# Altium PCB PCB2_2.pcbdoc
Units mil, origin at the board's own origin, x right, y up, seen from the top; angles counter-clockwise.
Board outline 1254.78 x 1706.7 mil, 4 copper layers (Top Layer, Inner1, Inner2, Bottom Layer); 47 components, 40 nets, 209 pads, 46 vias.
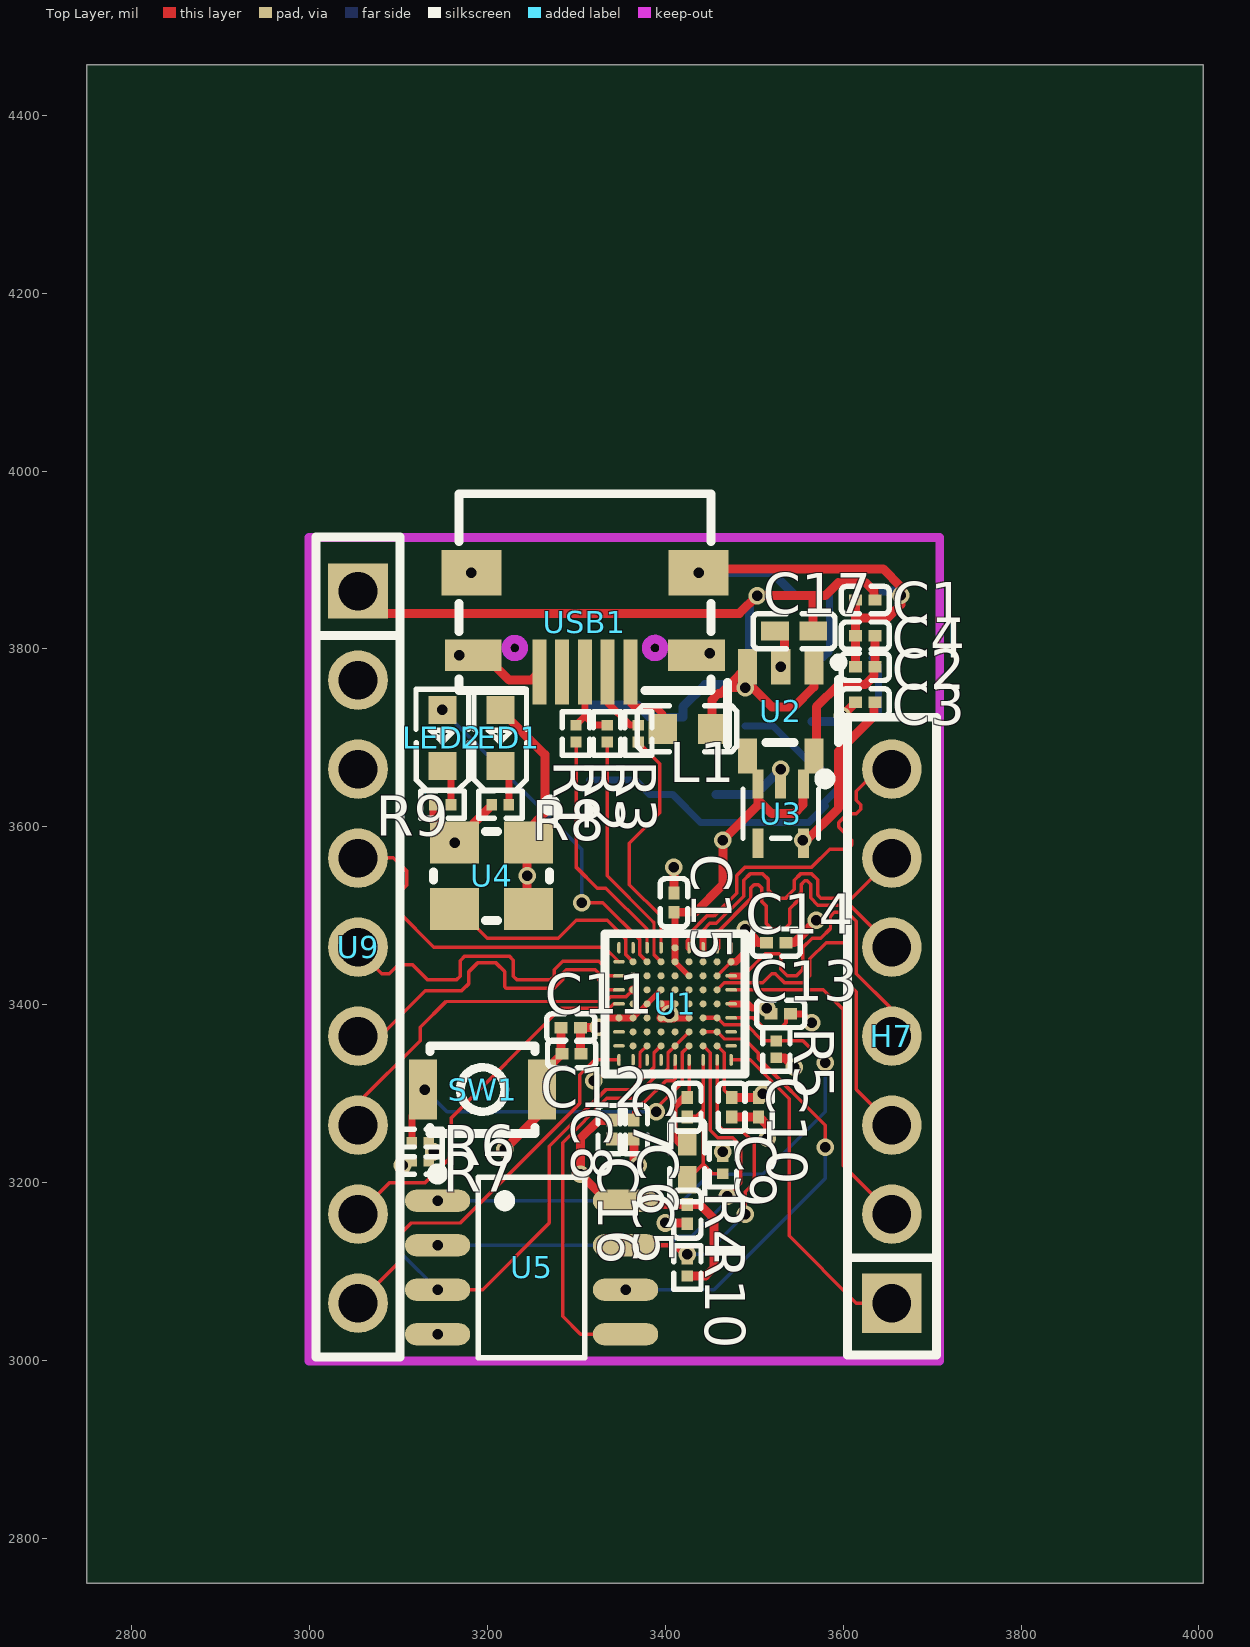
[diagram p0: Top Layer view]
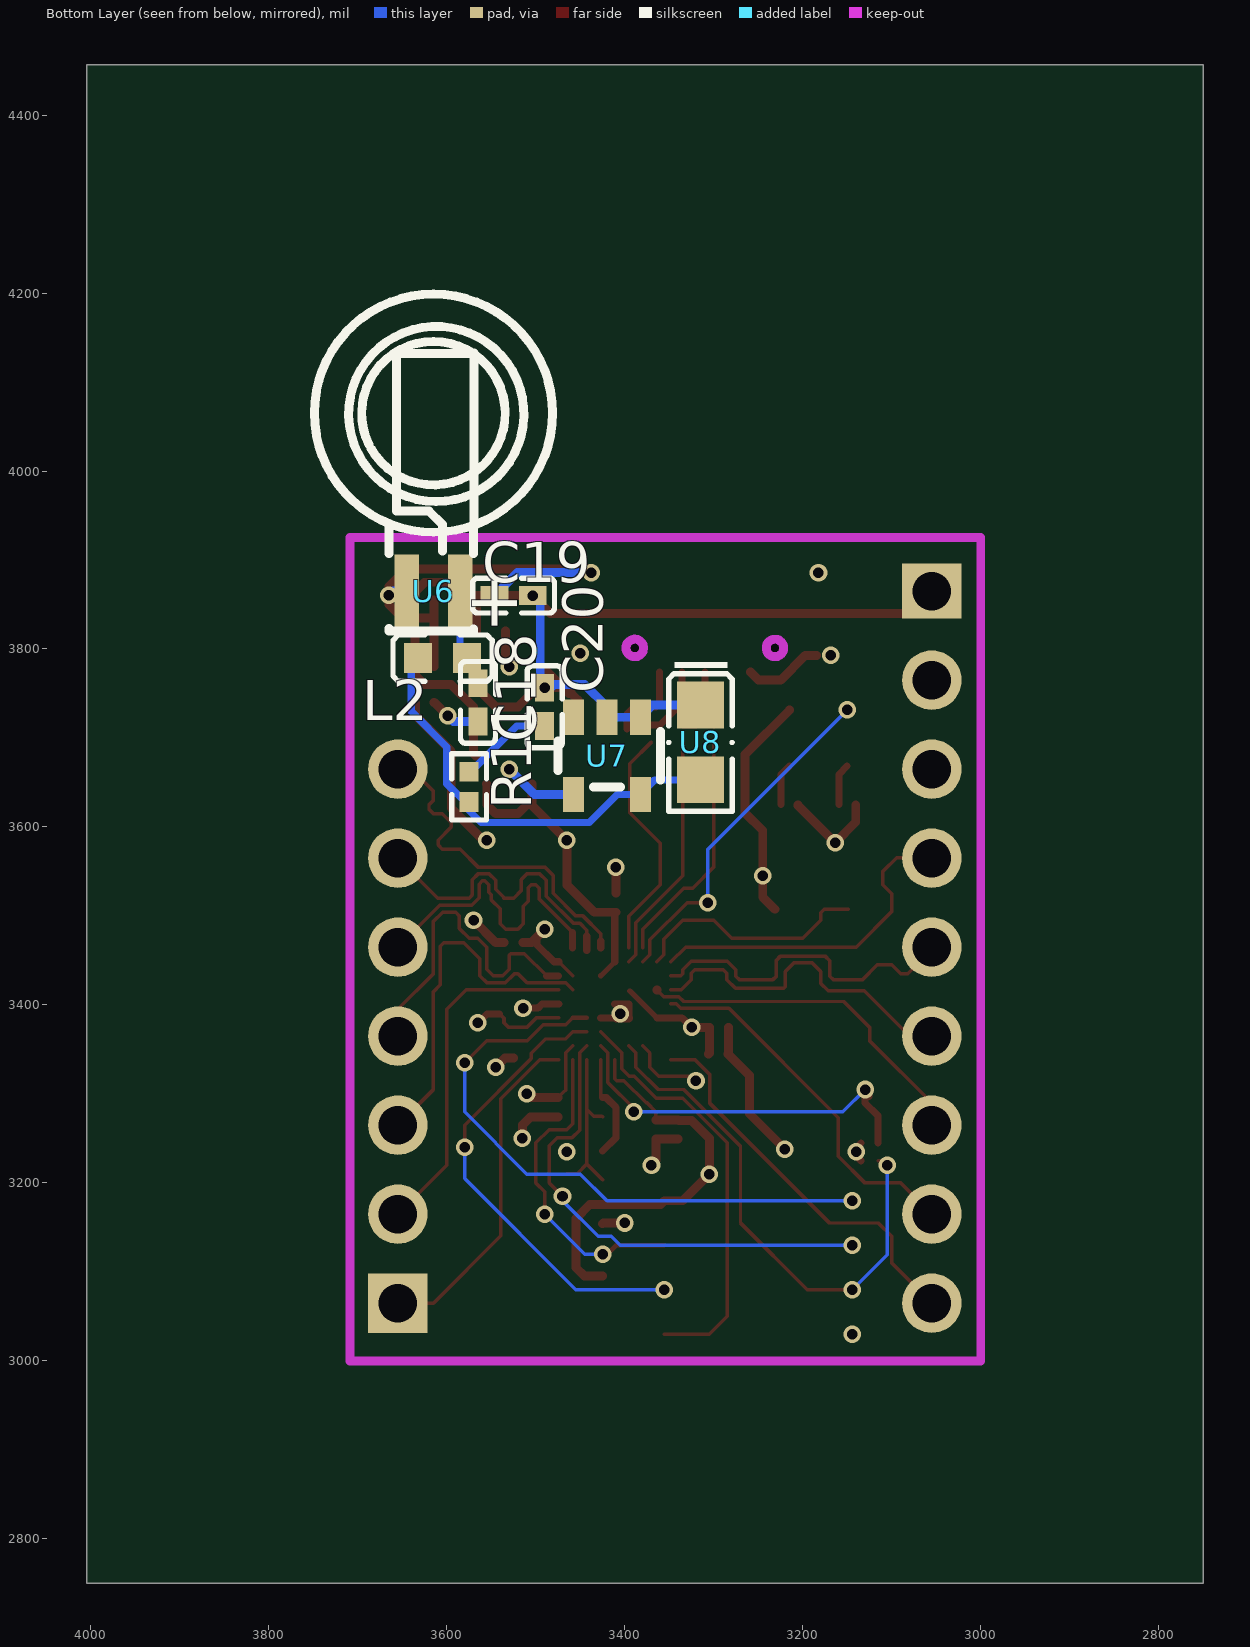
[diagram p1: Bottom Layer view, seen from below]
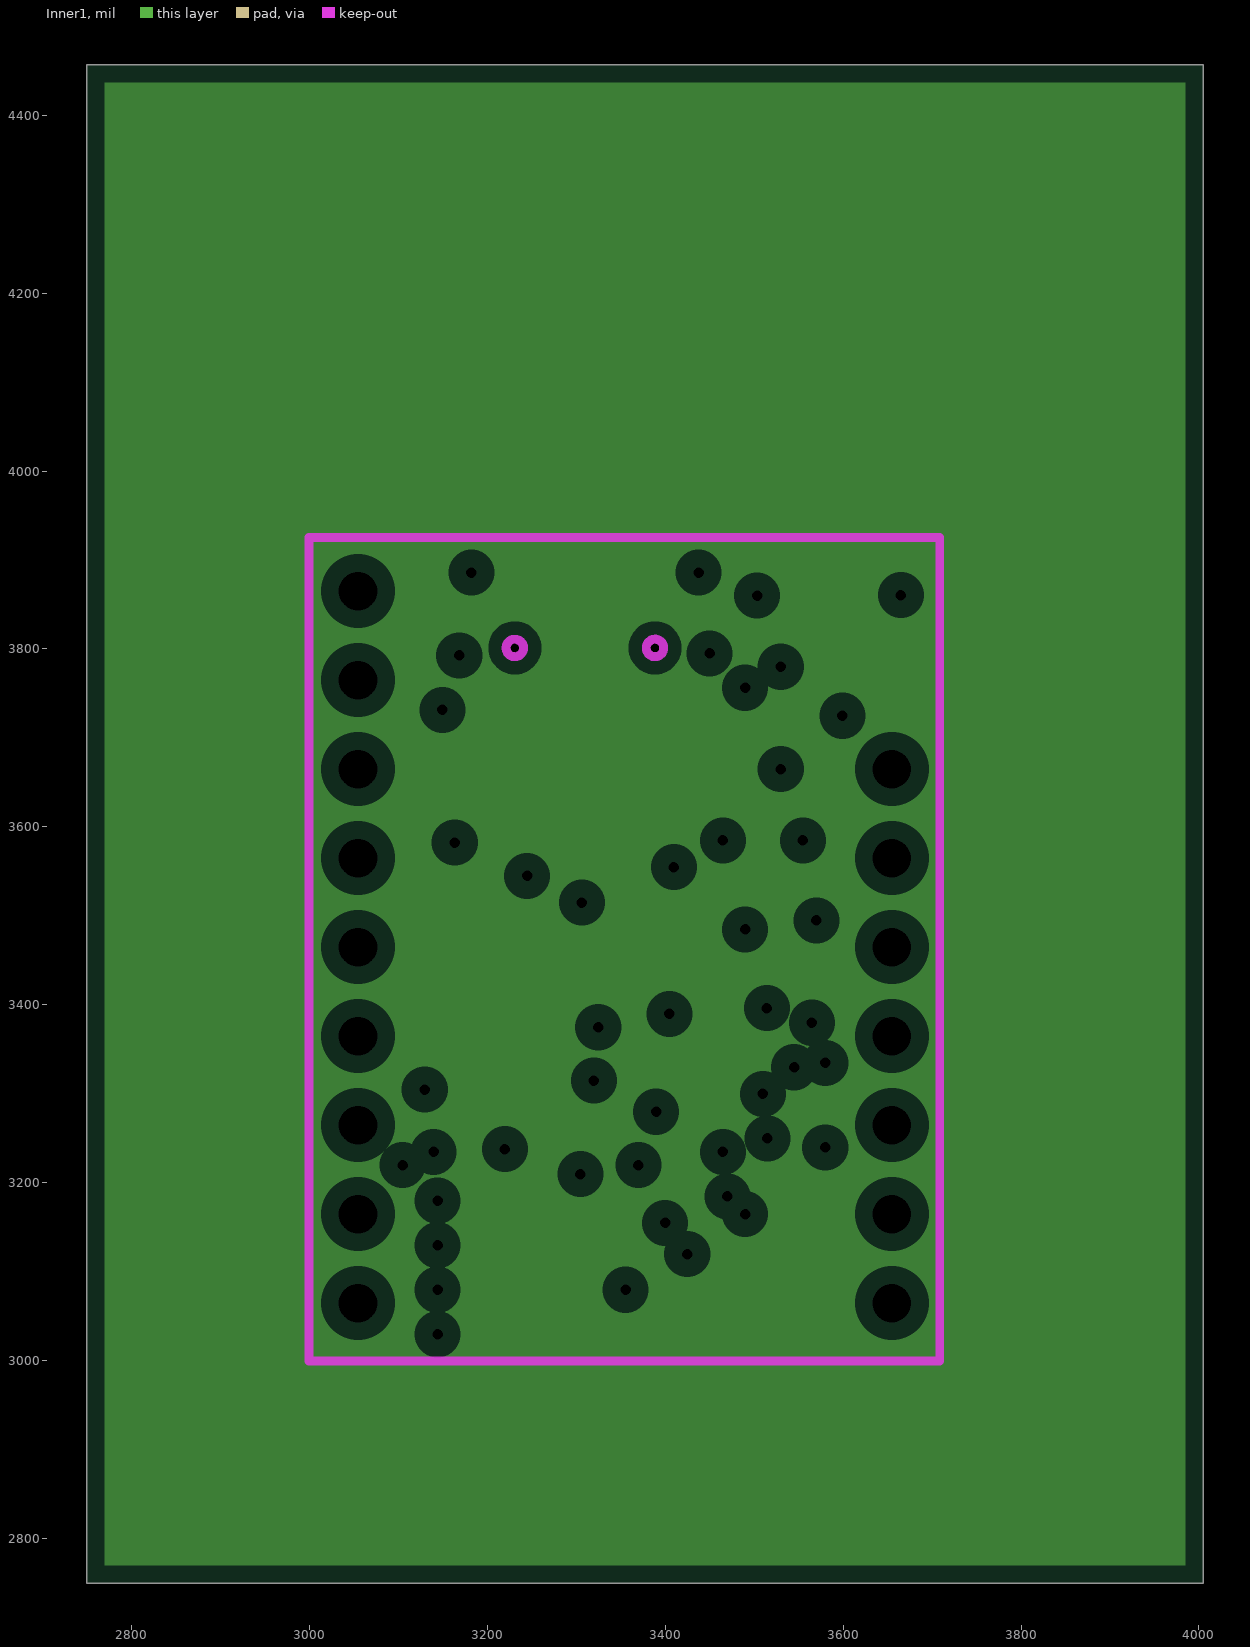
[diagram p2: Inner1, clearances drawn from the general rule]
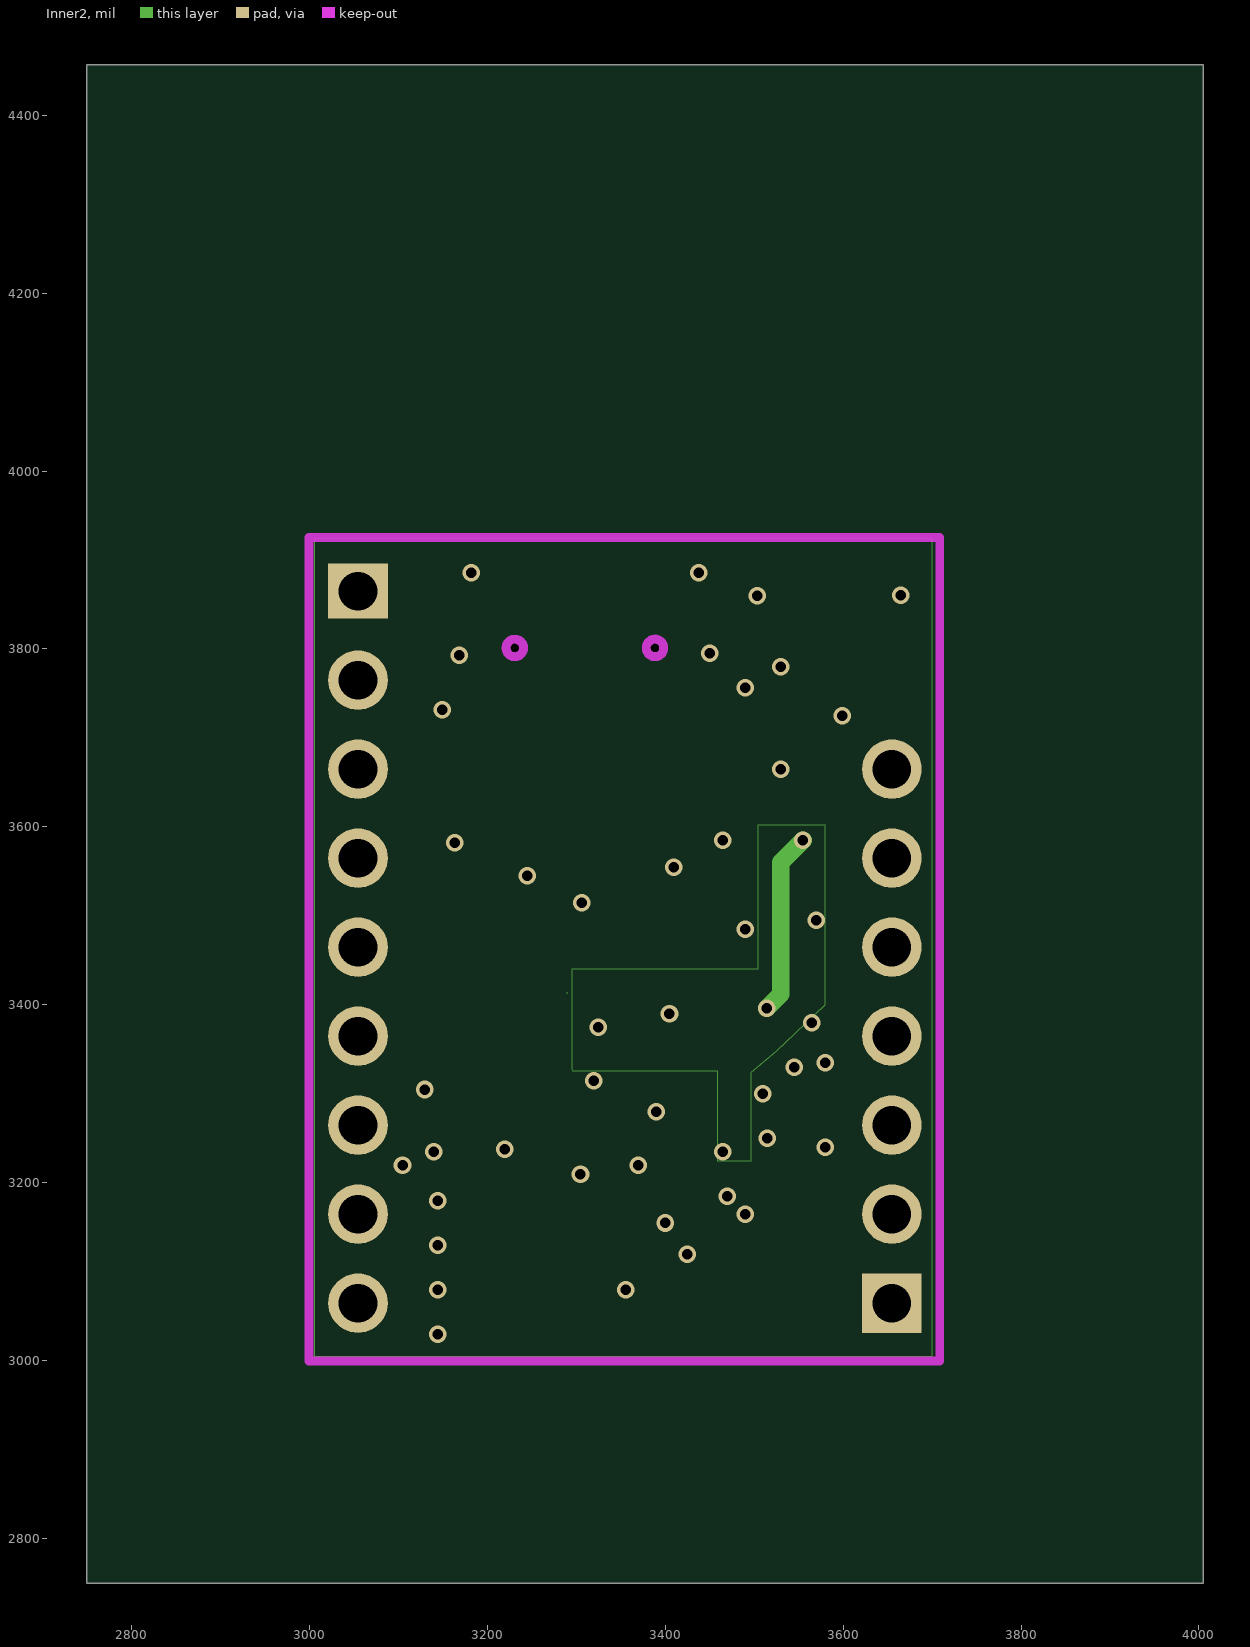
[diagram p3: Inner2]

## Layer stack, top to bottom
Top Solder Mask Layer: solder mask 0.4, Solder Resist, Dk 3.5
Top Layer: signal copper 1.4
Dielectric1: dielectric 12.6, FR-4, Dk 4.8
Inner1: plane copper 1.4
Dielectric6: dielectric 12.6, FR-4, Dk 4.8
Inner2: signal copper 1.4
Dielectric2: dielectric 12.6, FR-4, Dk 4.8
Bottom Layer: signal copper 1.4
Bottom Solder Mask Layer: solder mask 0.4, Solder Resist, Dk 3.5

## Board outline
4004.78,2750 2750,2750 2750,4456.7 4004.78,4456.7

## Design rules (kind name [scope] priority, off if disabled: settings)
Clearance copperThickness1oz [All] p1: gap=6 ignorepadtopadclearanceinfootprint=FALSE except(3.9: Track-Track Track-SMDPad Track-THPad Track-Via Track-Hole SMDPad-SMDPad SMDPad-THPad SMDPad-Via SMDPad-Hole THPad-THPad THPad-Via THPad-Hole Via-Via Via-Hole; 7: Arc-Arc Arc-Track Arc-SMDPad Arc-THPad Arc-Via Arc-Fill Arc-Poly Arc-Region Arc-Text Arc-Hole; 8: Track-Region; 11.8: Poly-Region)
Clearance copperThickness2oz [All] p2: gap=6 ignorepadtopadclearanceinfootprint=FALSE except(7: Arc-Arc Arc-Track Arc-SMDPad Arc-THPad Arc-Via Arc-Fill Arc-Poly Arc-Region Arc-Text Arc-Hole; 8: Track-Track; 11.8: Track-Region Poly-Region)
DiffPairsRouting differentialPair [All] p1: maxlimit=6 minlimit=0 mostfreqgap=6 toplayer_minwidth=5 toplayer_maxwidth=100 toplayer_prefwidth=10 midlayer2_minwidth=5 midlayer2_maxwidth=100 midlayer2_prefwidth=10 bottomlayer_minwidth=5 bottomlayer_maxwidth=100 bottomlayer_prefwidth=10 maxuncoupledlength=10
PasteMaskExpansion pasteMaskExpansion [All] p1: expansion=0
PlaneClearance [All] p1: clearance=20
PlaneConnect innerPlane [All] p1: planeconnectstyle=Relief reliefexpansion=20 reliefentries=4 reliefconductorwidth=10 reliefairgap=10
PolygonConnect copperRegion [All] p1: connectstyle=Relief reliefconductorwidth=10 reliefentries=4 polygonreliefangle="90 Angle" airgapwidth=10
RoutingVias viaSize [All] p1: holewidth=12 width=24 viastyle="Through Hole" minholewidth=11.8 minwidth=19.7 maxholewidth=248 maxwidth=393.7
SolderMaskExpansion solderMaskExpansion [All] p1: expansion=2 istentingtop=FALSE useseparateexpansions=TRUE expansionbottom=2 istentingbottom=FALSE
Width copperThickness1oz_1 [All] p1: maxlimit=100 minlimit=3 preferedwidth=10
Width copperThickness2oz_1 [All] p2: maxlimit=100 minlimit=8 preferedwidth=10
26 further rules are at their usual default settings.

## Components (designator, comment, footprint, x,y, rotation, side; value= is the part's Value field where it differs from the comment)
C1 "GRM033R61C105ME15D" C0201 3625,3855 r0 top
C2 "GRM033R61C105ME15D" C0201 3625,3780 r0 top
C3 "GRM033R61C105ME15D" C0201 3625,3740 r0 top
C4 "GRM033R61C105ME15D" C0201 3625,3815 r0 top
C5 "GRM033R61E104KE14D" C0201 3425,3165 r90 top
C6 "CL05A106MQ5NUNC" C0402 3425,3225 r90 top
C7 "GRM033R61E104KE14D" C0201 3425,3285 r90 top
C8 "GRM033R61E104KE14D" C0201 3340,3260 r90 top
C9 "GRM033R61E104KE14D" C0201 3475,3285 r90 top
C10 "GRM033R61E104KE14D" C0201 3505,3285 r90 top
C11 "GRM033R61E104KE14D" C0201 3294.09,3374.57 r0 top
C12 "GRM033R71A103KA01D" C0201 3295,3345 r0 top
C13 "GRM033R71A103KA01D" C0201 3530,3390 r180 top
C14 "GRM033R61E104KE14D" C0201 3525,3470 r180 top
C15 "GRM033R71A103KA01D" C0201 3410,3515 r270 top
C16 "GRM033R61E104KE14D" C0201 3365,3260 r90 top
C17 "CL05A106MQ5NUNC" C0402 3545,3820 r0 top
C18 "CC0402KRX7R7BB104" C0402 3565,3740 r90 bottom
C19 "CL05A226MQ5QUNC" C0402 3525,3860 r180 bottom
C20 "CL05A475MP5NRNC" C0402 3490,3735 r90 bottom
H7 "PZ254V-11-07P" HDR-TH_7P-P2.54-V-M 3655,3365 r90 top
L1 "SCL1608Q3R3KSP" L0603 3425,3710 r0 top
L2 "CMI160808U3R3KT" L0603 3605,3790 r0 bottom
LED1 "NCD0603R1_C84263" LED0603-RD_RED 3215,3700 r90 top
LED2 "NCD0603R1_C84263" LED0603-RD_RED 3150,3700 r90 top
R1 "0201WMF1501TEE" R0201 3300,3705 r270 top
R2 "RK73H1HTTC68R0F" R0201 3335,3705 r270 top
R3 "RK73H1HTTC68R0F" R0201 3370,3705 r270 top
R4 "RC0201FR-07100RL" R0201 3465,3220 r270 top
R5 "0201WMF1002TEE" R0201 3525,3350 r90 top
R6 "0201WMF4701TEE" R0201 3125,3245 r180 top
R7 "0201WMF1002TEE" R0201 3125,3225 r0 top
R8 "0201WMF2700TEE" R0201 3215,3625 r0 top
R9 "0201WMF2700TEE" R0201 3150,3625 r0 top
R10 "0201WMF1002TEE" R0201 3425,3105 r270 top
R11 "RC0402FR-0710KL" R0402 3575,3645 r90 bottom
SW1 "TS-3025-A-A-B" SW-SMD_L3.0-W2.5-P3.40-LS4.0-L 3195,3305 r0 top
U1 "ICE40LP8K-CM81" ice40_spec 3330,3320 r0 top
U2 "MIC5504-3.3YM5-TR" SOT-23-5_L3.0-W1.7-P0.95-LS2.8-TL 3530,3730 r270 top
U3 "MIC5365-1.2YC5-TR" SC-70-5_L2.1-W1.3-P0.65-LS2.1-BL 3530,3615 r180 top
U4 "DSC6001CI2A-016.0000" OSC-SMD_4P-L3.2-W2.5-BL_DSC1001CL5 3205,3545 r180 top
U5 "AT25SF081-SSHD-B" SOP-8_L4.9-W3.9-P1.27-LS6.0-BL 3250,3105 r270 top
U6 "MS621FE-FL11E" BAT-SMD_FL11E 3615,3865 r270 bottom
U7 "PW5100-50" SOT-23-5_L2.9-W1.6-P0.95-LS2.8-BL 3420,3680 r0 bottom
U8 "CD4148WSP" D0805-RD 3315,3695 r270 bottom
U9 "PM254-1-09-Z-8.5" HDR-TH_9P-P2.54-V-F 3055,3465 r270 top
USB1 "MICRO QTZB5.0" MICRO-USB-SMD_MICRO-QTZB5.0 3310,3830 r180 top

## Footprints (in the part's own frame and the unit in brackets; to place one, negate y for a bottom-side part, rotate by r counter-clockwise, add the part's x,y. Pads: shape width x height; smd on the part's side, far side on the other; paste and mask are expansions set on the pad)
BAT-SMD_FL11E [mm]
  rect 2.1x0.7 smd paste+0 mask+0.05: 1(0,0.762) 2(0,-0.762)
  silkscreen extent -8.48,-3.4 1.14,3.4
C0201 [mil]
  rect 14.51x12.76 smd paste-3937.01 mask+2: 1(-10.8,0) 2(10.8,0)
  silkscreen extent -27,-15 27,15
C0402 [mm]
  rect 0.79x0.54 smd paste-100 mask+0.051: 1(-0.545,0) 2(0.545,0)
  silkscreen extent -1.17,-0.5 1.17,0.5
D0805-RD [mm]
  rect 1.335x1.35 smd paste-100 mask+0.051: 1(-1.067,0) 2(1.067,0)
  silkscreen extent -2.29,-0.94 1.96,0.94
HDR-TH_7P-P2.54-V-M [mm]
  rect 1.7x1.7 hole 1.1: 1(-7.62,0)
  round 1.7 hole 1.1: 2(-5.08,0) 3(-2.54,0) 4(0,0) 5(2.54,0) 6(5.08,0) 7(7.62,0)
  silkscreen extent -9.1,-1.27 9.1,1.27
HDR-TH_9P-P2.54-V-F [mm]
  rect 1.575x1.7 hole 1.1: 1(-10.16,0)
  round 1.7 hole 1.1: 2(-7.62,0) 3(-5.08,0) 4(-2.54,0) 5(0,0) 6(2.54,0) 7(5.08,0) 8(7.62,0) 9(10.16,0)
  silkscreen extent -11.7,-1.2 11.7,1.2
ice40_spec [mm]
  oval 0.1x0.335 smd paste+0 mask+0.05: A1(0.464,3.664) A3(1.264,3.664) A4(1.664,3.664) A6(2.464,3.664) A7(2.864,3.664) A8(3.264,3.664) A9(3.664,3.664) J1(0.464,0.464) J3(1.264,0.464) J4(1.664,0.464) J5(2.064,0.464) J6(2.464,0.464) J7(2.864,0.464) J9(3.664,0.464)
  oval 0.1x0.33 smd paste+0 mask+0.05: A2(0.864,3.664) J2(0.864,0.464) J8(3.264,0.464)
  round 0.2 smd paste+0 mask+0.05: A5(2.064,3.664) B2(0.864,3.264) B3(1.264,3.264) B4(1.664,3.264) B5(2.064,3.264) B6(2.464,3.264) B7(2.864,3.264) B8(3.264,3.264) B9(3.664,3.264) C2(0.864,2.864) C3(1.264,2.864) C4(1.664,2.864) C5(2.064,2.864) C6(2.464,2.864) C7(2.864,2.864) C8(3.264,2.864) D2(0.864,2.464) D3(1.264,2.464) D4(1.664,2.464) D5(2.064,2.464) D6(2.464,2.464) D7(2.864,2.464) D8(3.264,2.464) E2(0.864,2.064) E3(1.264,2.064) E4(1.664,2.064) E5(2.064,2.064) E6(2.464,2.064) E7(2.864,2.064) E8(3.264,2.064) F1(0.464,1.664) F2(0.864,1.664) F3(1.264,1.664) F4(1.664,1.664) F5(2.064,1.664) F6(2.464,1.664) F7(2.864,1.664) F8(3.264,1.664) G2(0.864,1.264) G3(1.264,1.264) G4(1.664,1.264) G5(2.064,1.264) G6(2.464,1.264) G7(2.864,1.264) G8(3.264,1.264) H2(0.864,0.864) H3(1.264,0.864) H4(1.664,0.864) H5(2.064,0.864) H6(2.464,0.864) H7(2.864,0.864) H8(3.264,0.864)
  oval 0.33x0.1 smd paste+0 mask+0.05: B1(0.464,3.264) H1(0.464,0.864) H9(3.664,0.864)
  oval 0.335x0.1 smd paste+0 mask+0.05: C1(0.464,2.864) C9(3.664,2.864) D1(0.464,2.464) D9(3.664,2.464) E1(0.464,2.064) E9(3.664,2.064) F9(3.664,1.664) G1(0.464,1.264) G9(3.664,1.264)
L0603 [mm]
  rect 0.8x0.864 smd paste-100 mask+0.051: 1(-0.7,0) 2(0.7,0)
  silkscreen extent -1.42,-0.65 1.41,0.67
LED0603-RD_RED [mm]
  rect 0.8x0.8 smd: 1(-0.8,-0.003) 2(0.8,0.003)
  silkscreen extent -1.49,-0.75 1.39,0.76
MICRO-USB-SMD_MICRO-QTZB5.0 [mm]
  rect 0.4x1.85 smd: 1(-1.3,1.417) 2(-0.65,1.417) 3(0,1.417) 4(0.65,1.417) 5(1.3,1.417)
  rect 1.715x1.3 smd: 6(-3.242,-1.417) 6(3.242,-1.417)
  rect 1.625x0.9 smd: 6(-3.188,0.942) 6(3.188,0.942)
  Board Outline Layer board cut-out: -2.25,0.732 -2.225,0.623 -2.156,0.536 -2.056,0.488 -1.944,0.488 -1.844,0.536 -1.775,0.623 -1.75,0.732 -1.75,0.732 -1.775,0.84 -1.844,0.927 -1.944,0.976 -2.055,0.976 -2.156,0.927 -2.225,0.84 -2.25,0.732 -2.25,0.732
  Board Outline Layer board cut-out: 1.75,0.732 1.775,0.624 1.844,0.537 1.944,0.489 2.056,0.489 2.156,0.537 2.225,0.624 2.25,0.732 2.25,0.732 2.225,0.841 2.156,0.928 2.056,0.976 1.945,0.976 1.844,0.928 1.775,0.841 1.75,0.732 1.75,0.732
  Multi-Layer keep-out circle w0.254: c-2,0.732 r0.25
  Multi-Layer keep-out circle w0.254: c2,0.732 r0.25
  silkscreen extent -3.6,-3.67 3.6,1.95
OSC-SMD_4P-L3.2-W2.5-BL_DSC1001CL5 [mm]
  rect 1.4x1.2 smd: 1(-1.05,-0.95) 2(1.05,-0.95) 3(1.05,0.95) 4(-1.05,0.95)
  silkscreen extent -1.82,-2.17 1.65,1.27
R0201 [mil]
  rect 11.93x12.76 smd paste-3937.01 mask+2: 1(-9.51,0) 2(9.51,0)
  silkscreen extent -24,-15 24,15
R0402 [mm]
  rect 0.566x0.54 smd paste-100 mask+0.051: 1(-0.433,0) 2(0.433,0)
  silkscreen extent -0.94,-0.5 0.94,0.5
SC-70-5_L2.1-W1.3-P0.65-LS2.1-BL [mm]
  rect 0.315x0.835 smd: 1(-0.65,-0.843) 2(0,-0.843) 3(0.65,-0.843) 4(0.65,0.842) 5(-0.65,0.842)
  silkscreen extent -1.41,-1.14 1.08,0.7
SOP-8_L4.9-W3.9-P1.27-LS6.0-BL [mm]
  oval 0.63x1.865 smd: 1(-1.905,-2.682) 2(-0.635,-2.682) 3(0.635,-2.682) 4(1.905,-2.682) 5(1.905,2.682) 6(0.635,2.682) 7(-0.635,2.682) 8(-1.905,2.682)
  silkscreen extent -2.82,-2.83 2.58,1.52
SOT-23-5_L2.9-W1.6-P0.95-LS2.8-BL [mm]
  rect 0.6x1 smd paste+0 mask+0.05: 1(-0.95,-1.1) 2(0,-1.1) 3(0.95,-1.1) 4(0.95,1.1) 5(-0.95,1.1)
  silkscreen extent -1.52,-0.7 1.4,0.89
SOT-23-5_L3.0-W1.7-P0.95-LS2.8-TL [mm]
  rect 1x0.55 smd: 1(-1.271,0.95) 2(-1.271,0) 3(-1.271,-0.95) 4(1.271,-0.95) 5(1.271,0.95)
  silkscreen extent -1.52,-1.52 0.97,1.78
SW-SMD_L3.0-W2.5-P3.40-LS4.0-L [mm]
  rect 0.8x1.7 smd: 1(-1.7,0) 2(1.7,0)
  silkscreen extent -1.5,-1.25 1.5,1.25

## Via types
v1: diameter 19.7, hole 11.8, Top Layer to Bottom Layer, 46 vias

## Nets (pads, with @x,y where several pads share a name; then routed paths per layer and width w, separated by ;. In a path a pad name is that pad's centre, name@x,y a point inside that pad or via, vN(x,y) a via of type N, cw(c..) or ccw(c..) an arc to the next point about the centre after c; other vN are vias at no path point)
82: R7.1 U1.H4 U5.3 | length 593.5
  Top Layer w3.9: v1(3105,3220) 3110,3225 R7.1 ; v1(3144.39,3080) 3195,3080 3270,3155 3270,3241.38 3333.62,3305 3362.59,3305 3387.59,3330 3387.59,3346.1 U1.H4
  Bottom Layer w3.9: v1(3105,3220) 3105,3119.39 v1(3144.39,3080)
109: R10.1 U1.J8 U5.7 | length 365.8
  Top Layer w3.9: U1.J8 3458.5,3266.5 3465,3260 3485,3260 3500,3245 3500,3200 3490,3190 v1(3490,3165)
  Top Layer w5: U5.7 3409.51,3130 R10.1
  Bottom Layer w3.9: v1(3425,3120) 3445,3120 v1(3490,3165)
$1N3329: C6.2 C7.2 U1.J6 | length 118.2
  Top Layer w3.9: C7.2 3427.01,3297.81 U1.J6
  Top Layer w7.9: C6.2@3425,3235.8 3410,3250.8 3410,3285 3420.8,3295.8 C7.2
$1N3414: C6.1 C7.1 R4.2 U1.J7 | length 190.1
  Top Layer w3.9: C6.1 3442.76,3221.3 ; C7.1 3425.8,3275 3435,3275 3442.76,3282.76 ; U1.J7 3442.76,3282.76 ; R4.2 3453.59,3210.49 3442.76,3221.32 ; 3442.76,3221.32 3442.76,3282.76
$1N5132: R3.1 USB1.2 | length 79.5
  Top Layer w7.9: USB1.2 3335.59,3739.41 3360.49,3714.51 R3.1
$1N5138: R1.1 R2.1 USB1.3 | length 93
  Top Layer w7.9: R1.1 3310.01,3724.51 ; USB1.3 3310.01,3724.51 ; R2.1 3320.01,3714.51 3310.01,3724.51
$1N5314: L1.1 USB1.1 | length 93.6
  Top Layer w7.9: USB1.1 3361.18,3738.82 3365,3735 3389.55,3735 3397.45,3727.1 L1.1
$1N5697: LED1.1 R8.2 | length 47.4
  Top Layer w7.9: LED1.1 3224.51,3659.14 R8.2
$1N5723: LED2.1 R9.2 | length 47.4
  Top Layer w7.9: LED2.1 3159.51,3659.14 R9.2
$1N6048: U1.A9
$1N16359: C18.2 L2.1 U6.1 | length 78.1
  Bottom Layer w8: L2.1 3585,3797.55 U6.1
$1N16572: C20.1 R11.2 | length 104.5
  Bottom Layer w8: C20.1 3521.46,3713.54 3568.54,3666.46 R11.2@3575,3666.46
$1N16689: L2.2 R11.1 U7.5 U8.2 | length 489
  Bottom Layer w8: U8.2 3366.32,3652.97 U7.5 3408.31,3636.69 3440,3605 3561.46,3605 R11.1@3580,3623.54 ; R11.1@3575,3623.54 3600,3648.54 3600,3690 3640,3730 3640,3782.55 L2.2
+1V2: C3.2 C11.2 C12.2 C13.2 R4.1 U1.D4 U1.E3 U1.E9 U1.F1 U1.F2 U3.5 | length 578.8
  Top Layer w6: U1.F2 U1.E3 U1.D4@3394.25,3415.75
  Top Layer w8: v1(3325,3375) 3335.51,3385.51 U1.F1 U1.F2 ; U1.E9 3492.94,3401.26 3497.82,3396.38 v1(3514.38,3396.38)
  Top Layer w10: C12.2 3304.89,3345.91 C11.2 3324.57,3374.57 v1(3325,3375) ; v1(3555,3585) 3555.6,3584.4 U3.5 3595,3621.24 3595,3685 3635,3725 3635,3739.2 C3.2
  Inner2 w20: v1(3514.38,3396.38) 3530,3412 3530,3560 v1(3555,3585)
  other v1: 3465,3235
+3V3: C2.2 C4.2 C5.2 C8.2 C9.2 C10.2 C14.2 C15.2 C16.2 LED1.2 R5.1 R6.1 R7.2 R10.2 U1.A5 U1.B5 U1.B9 U1.C6 U1.C8 U1.H3 U1.H8 U1.J5 U2.4 U2.5 U3.1 U3.3 U4.1 U4.4 U5.8 U9.3 | length 1587.1
  Top Layer w3.7: 3360,3320 3361.84,3320 3371.84,3330 3371.84,3346.1 U1.H3
  Top Layer w3.8: 3468.48,3302.32 C9.2
  Top Layer w3.9: v1(3320,3315) 3325,3320 3360,3320 ; C16.2 3365,3280 3375,3290 3376.1,3290 3401.1,3315 3409.2,3315 3411.26,3317.06 U1.J5 ; U1.H8 3466.42,3346.1 3466.42,3304.38 3468.48,3302.32
  Top Layer w4: U1.C8 U1.B9
  Top Layer w6: U1.B5 U1.C6
  Top Layer w8: R7.2 3144.51,3235 R6.1 ; C15.2 3411.26,3502.94 U1.A5 U1.B5 ; U1.B9 3479.69,3448.5 3498.59,3467.4 3498.59,3476.41
  Top Layer w10: LED1.2 3265,3681.34 3265,3616.06 3245,3596.06 v1(3245,3545) 3245,3521.26 U4.4@3231.34,3507.6 ; C16.2 C8.2 3339.2,3270 3325,3270 3305,3250 v1(3305,3210) 3335,3180 U5.8 3359.81,3175.8 C5.2 3439.2,3175.8 3455,3160 3455,3105 3445.49,3095.49 R10.2 ; C15.2 3434.2,3504.2 3465,3535 v1(3465,3585) 3504.41,3624.41 3504.41,3630.59 ; C9.2 C10.2 ; v1(3490,3485) 3498.59,3476.41 3505,3470 C14.2 ; U3.3 3504.41,3630.59 ; R5.1 3534.51,3340.49 v1(3545,3330) ; U3.1 3555,3647.58 3555,3625 3545,3615 3520,3615 3504.41,3630.59 ; U2.5 3570,3682.54 3570,3735 3595,3760 3625,3760 3635,3770 3635,3779.2 C2.2 C4.2
  other v1: 3140,3235 3510,3300
+5V: C1.2 C17.2 C19.2 C20.2 L1.2 U2.1 U2.3 U7.1 U7.2 U8.1 U9.1 | length 1211.8
  Top Layer w3.9: U2.3@3492.59,3762.41 U2.3
  Top Layer w10: U9.1@3053.27,3865.47 3078.73,3840 3483.54,3840 v1(3503.54,3860) 3567.03,3860 ; L1.2 3452.55,3742.55 3460,3750 3462.54,3750 3472.41,3759.87 ; v1(3490,3756.46) 3475.83,3756.46 3472.41,3759.87 ; U2.3@3492.59,3762.41 3520,3735 3545,3735 3567.41,3757.41 U2.1 ; U2.3 3472.41,3759.87 ; C17.2 3566.46,3859.43 3567.03,3860 ; C1.2 3635,3855.8 3635,3865 3625,3875 3595,3875 3580,3860 3567.03,3860
  Bottom Layer w10: U8.1 3368.89,3737.03 U7.1 U7.2 3420,3735 3445,3760 3480,3760 3482.5,3757.5 3495,3770 3495,3851.46 v1(3503.54,3860)
CLK: U1.B2 U4.3 | length 271.7
  Top Layer w3.8: U4.3@3148.66,3507.6 3176.1,3507.6 3180,3503.7 3180,3495 3200,3475 3280,3475 3300,3495 3335,3495 3355,3475
  Top Layer w3.9: 3355,3475 3356.1,3473.9 3356.1,3456.42 U1.B2
CRESET_B: R6.2 SW1.1 U1.H6 | length 429.4
  Top Layer w3.9: v1(3390,3280) 3390,3283.83 3419.09,3312.92 3419.09,3346.1 U1.H6
  Top Layer w8: R6.2 3115.49,3275.49 3130,3290 v1(3130,3305) ; SW1.1@3125.49,3297.42 SW1.1@3128.07,3300
  Bottom Layer w3.9: v1(3130,3305) 3155,3280 v1(3390,3280)
ESP_3: U1.D1 U9.6 | length 384.9
  Top Layer w3.9: U9.6@3053.27,3365.47 3080.47,3365.47 3130.75,3415.75 3171.32,3415.75 3179.68,3424.12 3179.68,3437.6 3189.28,3447.2 3210.08,3447.2 3219.68,3437.6 3219.68,3420.32 3221.32,3418.68 3275.58,3418.68 3285.28,3428.37 3285.28,3435.51 3289.18,3439.41 3321.38,3439.41 3325.28,3435.51 3325.28,3428.37 3336.65,3417.01 U1.D1
ESP_4: U1.D2 U9.7 | length 395.7
  Top Layer w3.9: U9.7@3053.27,3265.47 3053.27,3288.27 3125,3360 3125,3375 3153.9,3403.9 3333.9,3403.9 3339.21,3409.21 3356.19,3409.19 U1.D2@3363.76,3416.75
  Top Layer w10: U1.D2@3363.76,3416.75 U1.D2
ESP_5: U1.E1 U9.8 | length 416.5
  Top Layer w3.9: U9.8 3090,3200 3130.13,3200 3160,3229.87 3160,3273.19 3282.91,3396.1 3337.13,3396.1 3342.29,3401.26 U1.E1
ESP_7: H7.1 U1.J9 | length 384.1
  Top Layer w3.9: U1.J9 3495.57,3338.27 3539.42,3294.42 3539.42,3140.58 3615,3065 H7.1
ESP_8: H7.2 U1.D9 | length 387.6
  Top Layer w3.9: U1.D9 3577.99,3417.01 3600,3395 3600,3220 H7.2
ESP_9: H7.3 U1.D8 | length 412.7
  Top Layer w3.9: U1.D8 3466.35,3424.86 3509.86,3424.86 3520,3435 3524.09,3435 3524.53,3434.53 3534.2,3424.86 3554.86,3424.86 3562.8,3432.8 3562.8,3451.77 3581.03,3470 3603.3,3470 3607.2,3466.1 3607.2,3422.8 3615,3415 3615,3305 H7.3
ESP_10: H7.4 U1.C9 | length 373.3
  Top Layer w3.9: 3487.76,3432.76 3512.77,3457.77 3528.35,3457.77 3530,3456.12 3530,3440.09 3537.33,3432.76 3547.76,3432.76 3555,3440 3555,3464.66 3565.34,3475 3575,3475 3585.93,3485.93 3585.93,3500 3590,3504.07 3590,3504.4 3604.57,3504.4 3615,3493.97 3615,3435 3655,3395 H7.4
  Top Layer w7.9: U1.C9 3487.76,3432.76
ESP_11: H7.5 U1.A8 | length 364.7
  Top Layer w3.9: 3458.5,3481.44 3496.09,3519.03 3496.09,3531.09 3500,3535 3505,3535 3508.44,3531.56 3508.44,3516.56 3513.96,3511.04 3513.96,3491.04 3520,3485 3533.87,3485 3540,3491.13 3540,3507.97 3550,3517.97 3550,3523.97 3552.8,3526.77 3552.8,3535 3557.2,3539.4 3560,3539.4 3563.6,3535.8 3563.6,3520.37 3571.77,3512.2 3607.8,3512.2 H7.5
  Top Layer w7.9: U1.A8 3458.5,3481.44
ESP_12: H7.6 U1.A7 | length 347.7
  Top Layer w3.9: 3442.76,3477.25 3442.76,3484.03 3450.38,3491.66 3457.69,3491.66 3488.29,3522.26 3488.29,3540 3495.49,3547.2 3510,3547.2 3516.24,3540.96 3516.24,3528.59 3524.83,3520 3535.99,3520 3535.99,3520.99 3545,3530 3545,3540 3552.2,3547.2 3565,3547.2 3571.4,3540.8 3571.4,3523.6 3575,3520 3610,3520 H7.6
  Top Layer w7.9: U1.A7@3442.76,3461.3 3442.76,3477.25
GND: C1.1 C2.1 C3.1 C4.1 C5.1 C8.1 C9.1 C10.1 C11.1 C12.1 C13.1 C14.1 C15.1 C16.1 C17.1 C18.1 C19.1 R8.1 R9.1 SW1.2 U1.E4 U1.E5 U1.F4 U1.F5 U1.F6 U1.F9 U2.2 U3.2 U4.2 U5.4 U6.2 U7.4 U9.2 USB1.5 USB1.6 | length 1472.2
  Top Layer w3.9: v1@3405.06,3390 U1.F5@3409.55,3385.51
  Top Layer w4.2: U1.F9 3499.49,3385.51 3510,3375 3530.8,3375 3535.8,3380 3535.8,3385 C13.1
  Top Layer w8: U1.F4 U1.E4 U1.E5 ; U1.F5@3409.55,3385.51 U1.F5 U1.F6 ; C13.1 3555,3390 v1(3565,3380)
  Top Layer w10: R9.1 3140.49,3605.58 v1(3163.66,3582.4) 3205.49,3624.23 R8.1 ; USB1.6@3184.51,3792.89 3197.11,3792.89 3225,3765 3249.63,3765 USB1.5 ; v1(3220,3238.07) 3260,3278.07 3260,3320.8 C12.1 3283.29,3345.91 C11.1 ; C8.1 C16.1 3365,3225 v1(3370,3220) ; U1.F4 U1.F5@3409.55,3385.51 ; v1(3400,3155) 3424.2,3155 C5.1 ; C15.1 v1(3410,3555) ; v1(3437.66,3885.8) 3441.85,3890 3645,3890 3665,3870 3665,3850 3649.63,3834.63 3614.2,3834.63 ; C9.1 3505.8,3274.2 3515,3265 v1(3515,3250) ; v1(3529.99,3780.05) 3534.2,3784.26 C17.1@3534.2,3820 ; C14.1 3545,3470 v1(3570,3495) ; v1(3599.2,3725) C3.1 ; C2.1 C4.1 3614.2,3834.63 ; C1.1 3614.2,3834.63
  Bottom Layer w10: v1(3437.66,3885.8) 3520.66,3885.8 C19.1 ; U7.4 3501.69,3636.69 v1(3530,3665) ; C18.1 3592.74,3718.54 v1(3599.2,3725) ; U6.2 3660.45,3865 v1(3665,3860.45)
  other v1: 3144.39,3030 3405,3390 3168.82,3792.89 3450,3795 3182.34,3885.8
INATN_1: U1.B1 U9.4 | length 383.9
  Top Layer w3.7: 3329.25,3465 3331.77,3465 U1.B1
  Top Layer w3.9: U9.4@3053.27,3565.47 3094.53,3565.47 3110,3550 3110,3535 3100,3525 3100,3505 3140,3465 3329.25,3465
INTAN_2: U1.C1 U9.5 | length 384.6
  Top Layer w3.9: U9.5@3053.27,3465.47 3053.27,3463.61 3081.88,3435 3090,3435 3100,3445 3116.28,3445 3132.7,3428.57 3165.88,3428.57 3169.78,3432.47 3169.78,3449.78 3175,3455 3225,3455 3229.58,3450.42 3229.58,3432.47 3233.48,3428.57 3271.48,3428.57 3275.38,3432.47 3275.38,3439.61 3285.08,3449.31 3325.48,3449.31 3335,3439.79 3335,3435 3337.24,3432.76 U1.C1
INTAN_3: U1.J1 U9.9 | length 442.9
  Top Layer w3.9: U9.9 3100,3110 3100,3140 3115,3155 3170,3155 3304.3,3289.3 3304.3,3321.5 3321.06,3338.27 U1.J1
INTAN_4: H7.7 U1.A6 | length 391.5
  Top Layer w3.9: 3427.01,3472.01 3427.01,3480 3447.01,3500 3455,3500 3480.49,3525.49 3480.49,3545.49 3490,3555 3565,3555 3585,3575 3605,3575 3609.74,3579.74 3609.74,3585.26 3595,3600 3595,3605 3605,3615 3615,3615 3620,3620 3620,3625 3615,3630 3615,3640 3640,3665 H7.7 H7.7@3655,3660
  Top Layer w7.9: U1.A6 3427.01,3472.01
LED: LED2.2 U1.B3 | length 383.5
  Top Layer w3.9: v1@3315,3515 3330,3515 3371.84,3473.16 3371.84,3456.42 U1.B3
  Bottom Layer w3.9: v1(3149.86,3731.48) 3306.6,3574.74 v1(3306.6,3515)
SCK: U1.G7 U1.G8 U5.6 | length 520.2
  Top Layer w3.7: U1.G7 U1.G8 3466.49,3361.77 3488.97,3361.77 3490,3360.74
  Top Layer w3.9: 3490,3360.74 3505,3345.74 3505,3339.87 3580,3264.87 v1(3580,3240)
  Bottom Layer w3.9: v1(3355.61,3080) 3455,3080 3580,3205 v1(3580,3240)
SDI: U1.H7 U5.2 | length 553.9
  Top Layer w3.9: U1.H7 3450.68,3346.1 3450.68,3259.32 3459.33,3250.67 3476.1,3250.67 3485,3241.77 3485,3200 v1(3470,3185)
  Bottom Layer w3.9: v1(3144.39,3130) 3405,3130 3415,3140 3430,3140 3470,3180 v1(3470,3185)
SDO: U1.G6 U1.H5 U5.5 | length 478.2
  Top Layer w3.9: U5.5 3305,3030 3285,3050 3285,3245.34 3334.66,3295 3364.48,3295 3389.48,3320 3395,3320 3403.34,3328.34 3403.34,3346.1 U1.H5 U1.G6
SS: R5.2 U1.F7 U1.F8 U5.1 | length 690.2
  Top Layer w3.9: U1.F8 3466.42,3377.59 3491.8,3377.59 3509.39,3360 3555,3360 v1(3580,3335)
  Top Layer w5: U1.F7 U1.F8
  Bottom Layer w3.9: v1(3144.39,3180) 3420,3180 3450,3210 3510,3210 3580,3280 v1(3580,3335)
USB_N: R3.2 U1.A4 | length 270.2
  Top Layer w3.8: R3.2 3394.25,3671.24 3394.25,3616.15 3360,3581.9 3360,3535 3395.51,3499.49 U1.A4
USB_P: R2.2 U1.B4 | length 272.1
  Top Layer w3.7: R2.2 3335,3545 3386.49,3493.51
  Top Layer w3.9: 3386.49,3493.51 3387.59,3492.41 3387.59,3456.42 U1.B4
USB_PU: R1.2 U1.A3 | length 270
  Top Layer w3.7: 3323.83,3531.17 3333.6,3531.17 3379.76,3485 U1.A3
  Top Layer w3.9: R1.2 3300,3555 3323.83,3531.17
pads on no net: U1.A1 U1.A2 U1.B6 U1.B7 U1.B8 U1.C2 U1.C3 U1.C4 U1.C5 U1.C7 U1.D3 U1.D5 U1.D6 U1.D7 U1.E2 U1.E6 U1.E7 U1.E8 U1.F3 U1.G1 U1.G2 U1.G3 U1.G4 U1.G5 U1.G9 U1.H1 U1.H2 U1.H9 U1.J2 U1.J3 U1.J4 U3.4 U7.3 USB1.4

## Polygon pours and split planes (outlines as drawn)
+3V3 on Inner2 "Inner2-+3V3" (solid, remove dead copper, pour order 0): 3005.98,3005 3700,3005 3700,3923.73 3005.98,3923.73
+1V2 on Inner2 "Inner2-+1V2" (solid, remove dead copper, pour order 1): 3289.55,3413.85 3290,3413.39 3290,3413.85
+1V2 on Inner2 "Inner2-+1V2 1" (solid, remove dead copper, pour order 2): 3295,3326.99 3295.79,3326.2 3458.62,3326.2 3458.62,3225 3496.85,3225 3496.85,3324.25 3525,3348.19 3580,3400 3580,3601.83 3504.41,3601.83 3504.41,3440 3295,3440
no net on Inner1 (split plane): 3984.69,2770.1 2770.1,2770.1 2770.1,4436.6 3984.69,4436.6

## Keep-outs
Board Outline Layer:
  lines w10: 3000,3000 3708.66,3000 3708.66,3925.2 3000,3925.2 3000,3000

## Silkscreen, mask and mechanical layers (free items; w line width, h text height)
Top Silkscreen Layer:
  lines w5: 3332.52,3322.52 3490,3322.52 3490,3480 3332.52,3480 3332.52,3322.52
  lines w10: 3332.52,3322.52 3490,3322.52 3490,3480 3332.52,3480 3332.52,3322.52

## Text inside footprints (layer, text, board x,y; h text height)
U6: Bottom Silkscreen Layer "+" at 3571.2,3885 h59.05 r90